# EAGLE board pcb_atmega (EAGLE 7.2.0)

Size 160 x 100 mm. Coordinates in mm from the lower left corner, seen from the top.
Outline: 0,0 160,0 160,100 0,100 0,0
Copper layers (1*16): Top 0.035mm / dielectric 1.5mm / Bottom 0.035mm
Design rules "default": minimum track width 10mil, minimum drill 24mil, track to track 8mil, track to pad 8mil, pad to pad 8mil, via to via 8mil, smd to smd 8mil, copper to edge 40mil, drill to drill 8mil, minimum pad ring 10mil, minimum via ring 8mil, stop-mask expansion 4mil, vias tented up to drill 0mil, thermal gap 10mil

## Footprints (pad centres in the part's own frame; a part is rotated, then mirrored left to right if it is on the bottom)
0805 = smd 1.397 x 1.27: 1 -1.143,0; 2 1.143,0
1210 = smd 1.6 x 2.7: 1 -1.4,0; 2 1.4,0
SMC_B = smd 1.6 x 2.4: + -1.5,0; - 1.5,0
CAP-5X10.5 = drill 1.016 pad 2.54: + -2.54,0; - 2.54,0
RJ45-PCB-SOCKET = drill 0.889 pad 1.676: 1 -4.445,6.35; 2 -3.175,8.89; 3 -1.905,6.35; 4 -0.635,8.89; 5 0.635,6.35; 6 1.905,8.89; 7 3.175,6.35; 8 4.445,8.89 | hole 3.251: -5.715,0; 5.715,0
ARK2-5X10,5MM = drill 1.5 pad 3: 1 -2.5,0; 2 2.5,0
ARK2-7.5X10.5MM = drill 1.4 pad 3: 1 -3.75,0 | drill 1.5 pad 3: 2 3.75,0
DO-214_TRANSIL2 = smd 2 x 2.5: A 2.82,0; C -2.82,0
DO-214 = smd 2 x 2.5: A 2.82,0; C -2.82,0
DIL28-3 = drill 0.813 long: 1 -16.51,-3.81; 2 -13.97,-3.81; 3 -11.43,-3.81; 4 -8.89,-3.81; 5 -6.35,-3.81; 6 -3.81,-3.81; 7 -1.27,-3.81; 8 1.27,-3.81; 9 3.81,-3.81; 10 6.35,-3.81; 11 8.89,-3.81; 12 11.43,-3.81; 13 13.97,-3.81; 14 16.51,-3.81; 15 16.51,3.81; 16 13.97,3.81; 17 11.43,3.81; 18 8.89,3.81; 19 6.35,3.81; 20 3.81,3.81; 21 1.27,3.81; 22 -1.27,3.81; 23 -3.81,3.81; 24 -6.35,3.81; 25 -8.89,3.81; 26 -11.43,3.81; 27 -13.97,3.81; 28 -16.51,3.81
SOT-223 = smd 1.27 x 2.159: 1 -2.311,-3.099; 2 0,-3.099; 3 2.311,-3.099 | smd 3.556 x 2.159: 4 0,3.099
TO220V = drill 1.016 long: 1 -2.54,-2.54; 2 0,-2.54; 3 2.54,-2.54
SO-16 = smd 2.4 x 0.8: 1 -2.54,4.445; 2 -2.54,3.175; 3 -2.54,1.905; 4 -2.54,0.635; 5 -2.54,-0.635; 6 -2.54,-1.905; 7 -2.54,-3.175; 8 -2.54,-4.445; 9 2.54,-4.445; 10 2.54,-3.175; 11 2.54,-1.905; 12 2.54,-0.635; 13 2.54,0.635; 14 2.54,1.905; 15 2.54,3.175; 16 2.54,4.445
SIP-5 = drill 0.813 pad 1.676 square: 1 -5.08,0 | drill 0.813 pad 1.676 octagon: 2 -2.54,0; 3 0,0; 4 2.54,0; 5 5.08,0
RELAY_RT = drill 1.3 pad 3: 11A 7.62,3.81; 11B 7.62,-3.81; 12A 2.54,3.81; 12B 2.54,-3.81; 14A 12.7,3.81; 14B 12.7,-3.81 | drill 1.3 pad 2.5: A1 -12.7,-3.81; A2 -12.7,3.81; A3 -12.7,0
S10K = drill 1.016 long: 1 -1.397,-3.81; 2 1.397,3.81
SOIC8_N_MC = smd 1.981 x 0.559: 1 -2.362,1.905; 2 -2.362,0.635; 3 -2.362,-0.635; 4 -2.362,-1.905; 5 2.362,-1.905; 6 2.362,-0.635; 7 2.362,0.635; 8 2.362,1.905
SOIC18_W_MC = smd 1.981 x 0.559: 1 -4.521,5.08; 2 -4.521,3.81; 3 -4.521,2.54; 4 -4.521,1.27; 5 -4.521,0; 6 -4.521,-1.27; 7 -4.521,-2.54; 8 -4.521,-3.81; 9 -4.521,-5.08; 10 4.521,-5.08; 11 4.521,-3.81; 12 4.521,-2.54; 13 4.521,-1.27; 14 4.521,0; 15 4.521,1.27; 16 4.521,2.54; 17 4.521,3.81; 18 4.521,5.08
HC49/S = drill 0.7 pad 1.27: 1 -2.413,0; 2 2.413,0

## Placement (x,y rotation side)
C1  100n  [0805]  -8.89,53.34 0 top  (outside the outline)
C2  22p  [0805]  146.05,26.67 90 top
C3  22p  [0805]  146.05,45.72 90 top
C4  10u/6V  [0805]  -6.35,43.18 0 top  (outside the outline)
C5  100n  [0805]  -21.59,11.43 0 top  (outside the outline)
C6  100n  [0805]  -16.51,-2.54 0 top  (outside the outline)
C7  100n  [0805]  -26.67,40.64 0 top  (outside the outline)
C8  100n  [0805]  -7.62,34.29 0 top  (outside the outline)
C9  10u/50V  [1210]  29.21,27.94 90 top
C10  100n  [0805]  -17.78,31.75 0 top  (outside the outline)
C11  100n  [0805]  -21.59,29.21 0 top  (outside the outline)
C12  10u/6V  [SMC_B]  66.04,33.02 0 top
C13  10u/50V  [1210]  40.64,24.13 0 top
C14  100n  [0805]  -29.21,22.86 0 top  (outside the outline)
C15  100n  [0805]  -10.16,13.97 0 top  (outside the outline)
C16  1000u/16V  [CAP-5X10.5]  13.97,21.59 0 top
C17  100n  [0805]  10.16,35.56 0 top
C18  100n  [0805]  21.59,34.29 0 top
C19  22p  [0805]  118.11,2.54 0 top
C20  22p  [0805]  115.57,20.32 0 top
CON1  [RJ45-PCB-SOCKET]  54.61,8.89 0 top
CON1A  TERMINAL-2  [ARK2-5X10,5MM]  54.61,11.43 0 top
CON2  [RJ45-PCB-SOCKET]  31.75,8.89 0 top
CON2A  TERMINAL-2  [ARK2-5X10,5MM]  31.75,10.16 0 top
CON3  TERMINAL-2  [ARK2-7.5X10.5MM]  16.51,93.98 0 top
CON4  TERMINAL-2  [ARK2-7.5X10.5MM]  31.75,93.98 0 top
CON5  TERMINAL-2  [ARK2-7.5X10.5MM]  46.99,93.98 0 top
CON6  TERMINAL-2  [ARK2-7.5X10.5MM]  66.04,93.98 0 top
CON7  TERMINAL-2  [ARK2-7.5X10.5MM]  81.28,93.98 0 top
CON8  TERMINAL-2  [ARK2-7.5X10.5MM]  96.52,93.98 0 top
D1  P6SMB33CA  [DO-214_TRANSIL2]  31.75,22.86 0 top
D2  S1D  [DO-214]  55.88,24.13 0 top
IC1  MEGA8-P  [DIL28-3]  92.71,10.16 0 top
IC3  MCP1790  [SOT-223]  52.07,31.75 0 top
IC4  7812  [TO220V]  160.02,20.32 270 top
IC5  ULN2003  [SO-16]  130.81,34.29 90 top
IC6  ULN2003  [SO-16]  109.22,34.29 90 top
ICSP  [SIP-5]  157.48,7.62 270 top
K1  [RELAY_RT]  16.51,60.96 90 top
K2  [RELAY_RT]  34.29,60.96 90 top
K3  [RELAY_RT]  49.53,60.96 90 top
K4  [RELAY_RT]  64.77,60.96 90 top
K5  [RELAY_RT]  80.01,59.69 90 top
K6  [RELAY_RT]  95.25,59.69 90 top
L1  BLM21A102SPT  [0805]  31.75,34.29 0 top
L2  BLM21A102SPT  [0805]  39.37,34.29 0 top
R1  10k  [0805]  110.49,46.99 0 top
R2  470R  [0805]  119.38,54.61 0 top
R3  4k7  [0805]  139.7,20.32 0 top
R4  51k 1%  [0805]  3.81,41.91 0 top
R5  10k 1%  [0805]  -17.78,43.18 0 top  (outside the outline)
R6  75R  [0805]  20.32,40.64 0 top
R7  75R  [0805]  11.43,40.64 0 top
R8  75R  [0805]  39.37,39.37 0 top
R9  75R  [0805]  31.75,39.37 0 top
R10  75R  [0805]  53.34,40.64 0 top
R11  75R  [0805]  45.72,40.64 0 top
R12  75R  [0805]  68.58,40.64 0 top
R13  75R  [0805]  60.96,40.64 0 top
R14  75R  [0805]  85.09,40.64 0 top
R15  75R  [0805]  76.2,40.64 0 top
R16  75R  [0805]  100.33,41.91 0 top
R17  75R  [0805]  92.71,40.64 0 top
R18  VAR10-250  [S10K]  15.24,82.55 270 top
R19  VAR10-250  [S10K]  34.29,82.55 270 top
R20  VAR10-250  [S10K]  48.26,81.28 270 top
R21  VAR10-250  [S10K]  64.77,81.28 270 top
R22  VAR10-250  [S10K]  81.28,81.28 270 top
R23  VAR10-250  [S10K]  95.25,81.28 270 top
U$1  MCP2551_X_SN  [SOIC8_N_MC]  144.78,11.43 0 top
U$2  MCP2515_X_SO  [SOIC18_W_MC]  130.81,13.97 180 top
Y1  8MHz  [HC49/S]  146.05,35.56 90 top
Y2  8MHz  [HC49/S]  116.84,11.43 90 top

## Library data of the parts
C1-C20 CON1 CON1A CON2 CON2A CON3-CON8 D1 D2 IC3-IC6 ICSP K1-K6 L1 L2 R1-R23 Y1 Y2 = HAPCAN_devices - UNIV3
IC1 = atmel; OC_FARNELL: unknown; OC_NEWARK: unknown
U$1 = MCP2551
U$2 = MCP2515

## Nets
+5V: C5.1 C6.1 C11.1 C12.+ IC1.7 IC3.3 ICSP.2 R1.1 U$1.3
+12V: C15.1 C16.+ C17.2 C18.2 IC4.3 IC5.9 IC6.9 R6.1 R7.1 R8.1 R9.1 R10.1 R11.1 R12.1 R13.1 R14.1 R15.1 R16.1 R17.1
AVCC: IC1.20
GND: C1.2 C2.2 C3.2 C4.2 C5.2 C6.2 C7.2 C8.2 C9.2 C10.2 C11.2 C12.- C13.2 C14.2 C15.2 C16.- C17.1 C18.1 C19.2 C20.2 CON1.5 CON1.7 CON2.5 CON2.7 CON2A.1 D1.C IC1.8 IC1.22 IC3.2 IC3.4 IC4.2 IC5.8 IC6.8 ICSP.3 R3.1 R5.1 U$1.2
K1A1: IC5.16 K1.A1 R6.2
K1A2: IC6.16 K1.A2 R7.2
K2A1: IC5.15 K2.A1 R8.2
K2A2: IC6.15 K2.A2 R9.2
K3A1: IC5.14 K3.A1 R10.2
K3A2: IC6.14 K3.A2 R11.2
K4A1: IC5.13 K4.A1 R12.2
K4A2: IC6.13 K4.A2 R13.2
K5A1: IC5.12 K5.A1 R14.2
K5A2: IC6.12 K5.A2 R15.2
K6A1: IC5.11 K6.A1 R16.2
K6A2: IC6.11 K6.A2 R17.2
N$1: D2.C L1.2 L2.2
N$2: U$1.4 U$2.1
N$3: U$1.1 U$2.2
N$4: CON1.1 CON1A.2 CON2.1
N$5: C9.1 C10.1 IC3.1 L1.1 R4.1
N$6: C13.1 C14.1 IC4.1 L2.1
N$7: C1.1 R1.2 R2.1
N$8: IC1.1 ICSP.1 R2.2
N$9: C8.1 CON1.4 CON1.8 CON2.4 CON2.8 CON2A.2 D1.A D2.A
N$10: IC1.19 U$2.13
N$11: IC1.18 U$2.15
N$12: R3.2 U$1.5 U$1.6 U$1.7 U$1.8
N$13: C7.1 R4.2 R5.2
N$14: IC1.17 U$2.14
N$15: C3.1 IC1.10 Y1.2
N$16: IC5.1
N$17: IC5.2
N$18: IC1.16 U$2.16
N$19: C20.1 U$2.8 Y2.2
N$20: IC5.3
N$21: IC5.4
N$22: C19.1 U$2.7 Y2.1
N$23: IC5.5
N$25: IC5.6
N$27: CON1.2 CON1A.1 CON2.2
N$30: CON3.1 K1.11A K1.11B R18.1
N$32: CON3.2 K1.14A K1.14B R18.2
N$40: C2.1 IC1.9 Y1.1
N$51: CON4.2 K2.14A K2.14B R19.2
N$52: CON5.2 K3.14A K3.14B R20.2
N$53: CON6.2 K4.14A K4.14B R21.2
N$54: CON7.2 K5.14A K5.14B R22.2
N$55: CON8.2 K6.14A K6.14B R23.2
N$56: C4.1
N$57: CON4.1 K2.11A K2.11B R19.1
N$58: CON5.1 K3.11A K3.11B R20.1
N$59: CON6.1 K4.11A K4.11B R21.1
N$60: CON7.1 K5.11A K5.11B R22.1
N$61: CON8.1 K6.11A K6.11B R23.1

## Tracks (layer width: path | path; a pad name or v marks a point on that pad's centre or on a via)
+5V  (8 unrouted)
+12V  (18 unrouted)
GND  (36 unrouted)
K1A1  (2 unrouted)
K1A2  (2 unrouted)
K2A1  (2 unrouted)
K2A2  (2 unrouted)
K3A1  (2 unrouted)
K3A2  (2 unrouted)
K4A1  (2 unrouted)
K4A2  (2 unrouted)
K5A1  (2 unrouted)
K5A2  (2 unrouted)
K6A1  (2 unrouted)
K6A2  (2 unrouted)
N$1  (2 unrouted)
N$2  (1 unrouted)
N$3  (1 unrouted)
N$4  (2 unrouted)
N$5  (4 unrouted)
N$6  (3 unrouted)
N$7  (2 unrouted)
N$8  (2 unrouted)
N$9  (7 unrouted)
N$10  (1 unrouted)
N$11  (1 unrouted)
N$12  (4 unrouted)
N$13  (2 unrouted)
N$14  (1 unrouted)
N$15  (2 unrouted)
N$18  (1 unrouted)
N$19  (2 unrouted)
N$22  (2 unrouted)
N$27  (2 unrouted)
N$30  (3 unrouted)
N$32  (3 unrouted)
N$40  (2 unrouted)
N$51  (3 unrouted)
N$52  (3 unrouted)
N$53  (3 unrouted)
N$54  (3 unrouted)
N$55  (3 unrouted)
N$57  (3 unrouted)
N$58  (3 unrouted)
N$59  (3 unrouted)
N$60  (3 unrouted)
N$61  (3 unrouted)